# Altium PCB CH32V307VCT6-MINI底板文件.PcbDoc
Units mil, origin at the board's own origin, x right, y up, seen from the top; angles counter-clockwise.
Board outline 1950 x 1550 mil, 2 copper layers (Top Layer, Bottom Layer), stack 12.8 mil thick; 5 components, 0 nets, 98 pads, 0 vias.
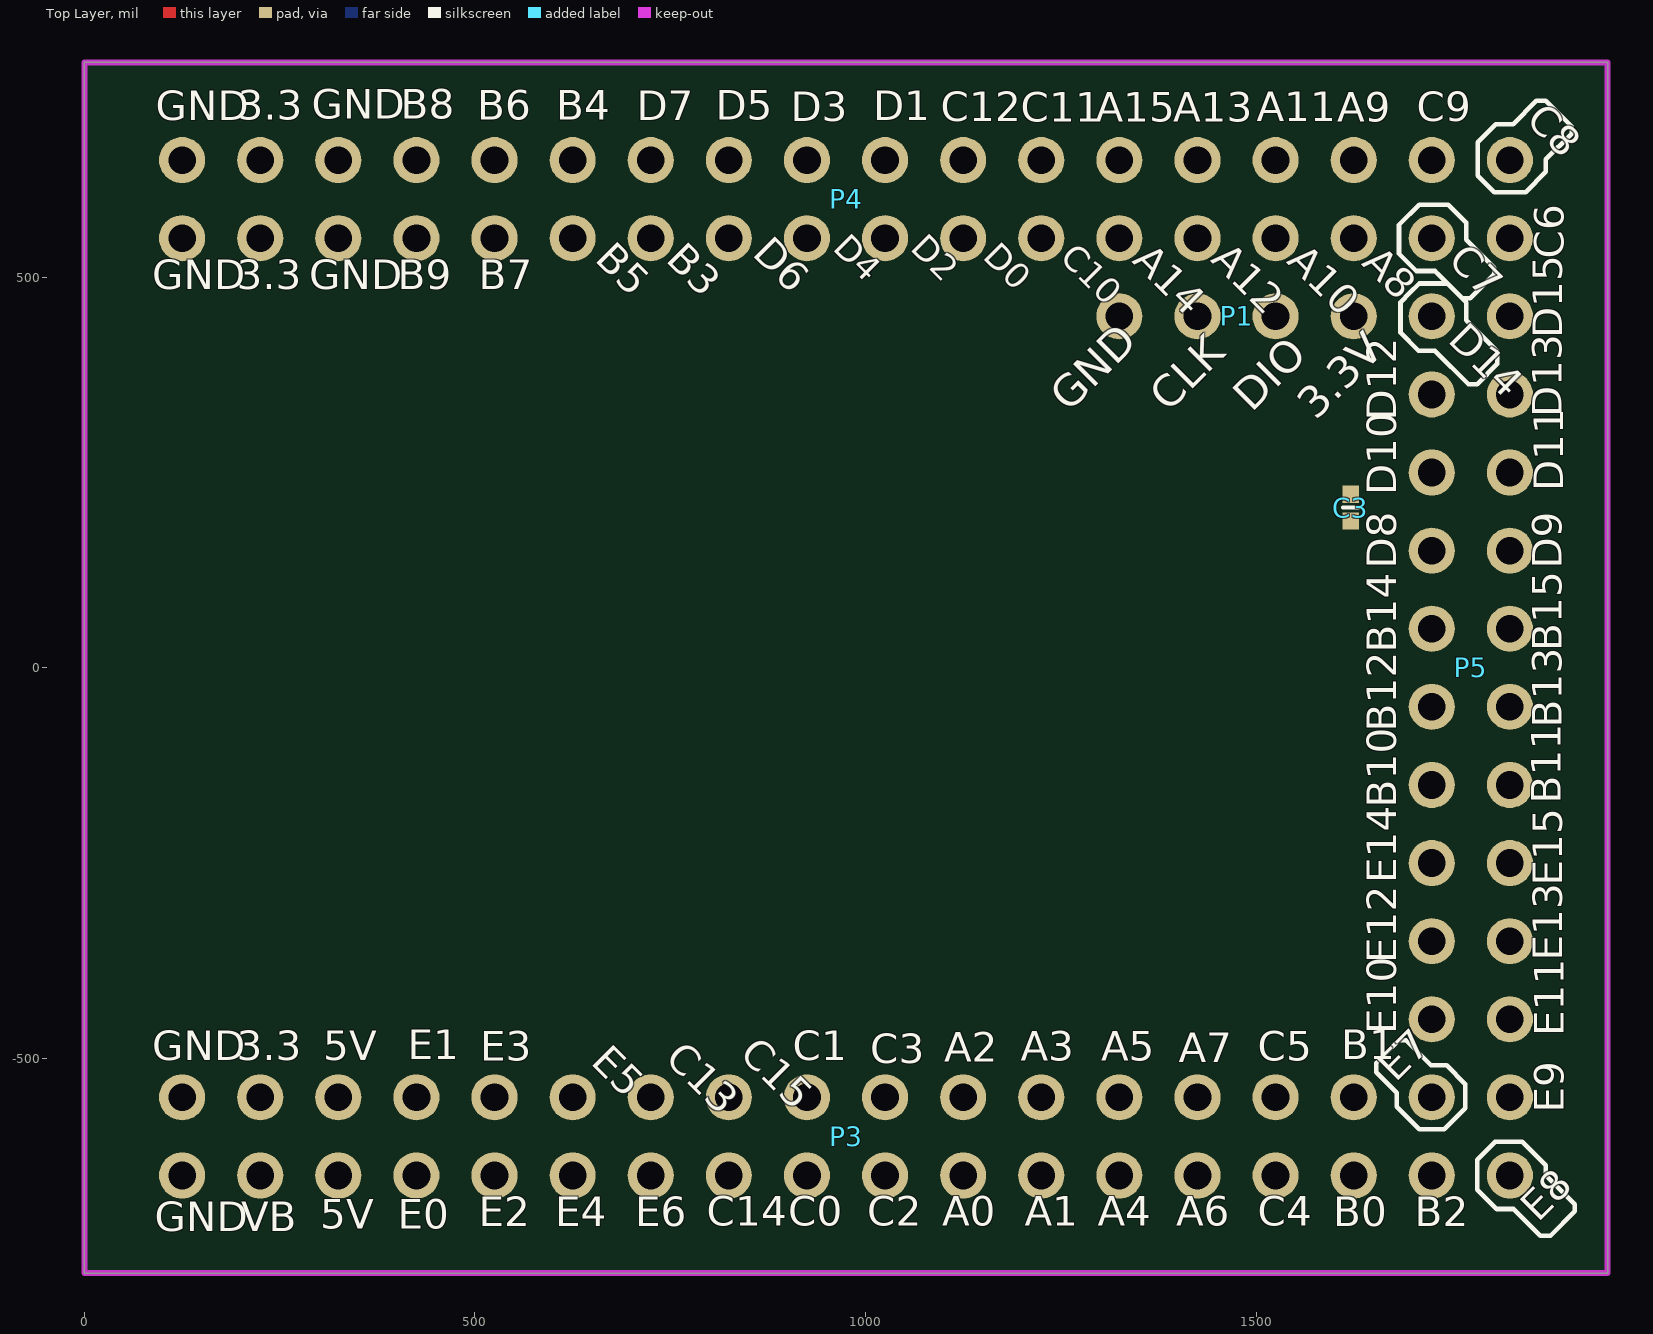
[diagram p0: Top Layer view]
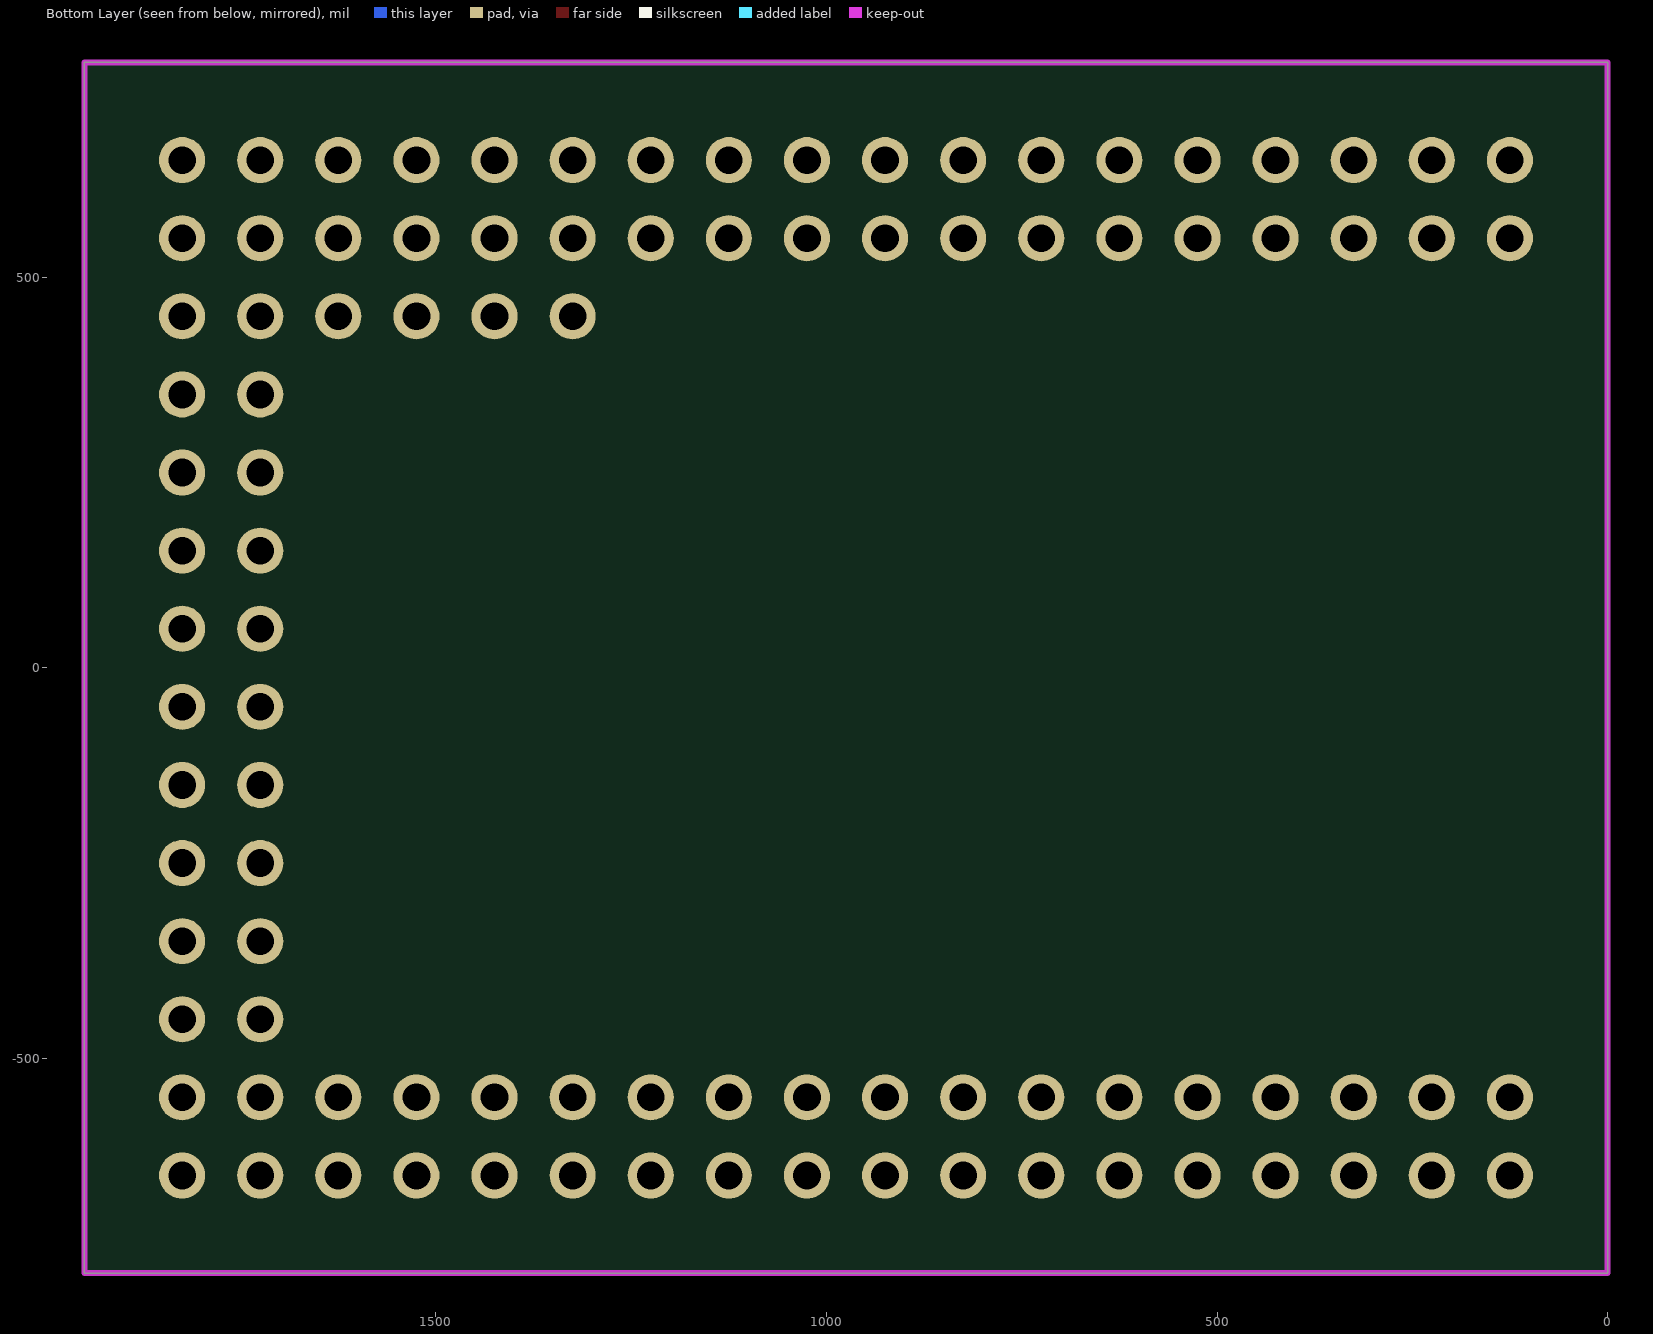
[diagram p1: Bottom Layer view, seen from below]

## Layer stack, top to bottom
Top Solder: solder mask 0.4, Solder Resist, Dk 3.5
Top Layer: signal copper 1.4
Dielectric 1: core 10, FR-4, Dk 4.2
Bottom Layer: signal copper 1.4
Bottom Solder: solder mask 0.4, Solder Resist, Dk 3.5

## Board outline
291,775 1950,775 1950,-464 1950,-775 45,-775 0,-775 0,-202 0,775 28,775

## Design rules (kind name [scope] priority, off if disabled: settings)
Clearance [All] p1: gap=5 ignorepadtopadclearanceinfootprint=FALSE except(0: Arc-Hole Track-Hole SMDPad-Hole THPad-Hole Via-Hole Fill-Hole Poly-Hole Region-Hole Text-Hole)
HoleToHoleClearance [All] p1: gap=0 allowstackedmicrovias=TRUE
Length "InNet('FMC_A3') Or InNet('FMC_A1')" [InNet('FMC_A3') Or InNet('FMC_A1')] p1: maxlimit=2088.86 minlimit=2000
MinimumSolderMaskSliver [All] p1: minsoldermaskwidth=0
PolygonConnect [(InPadClass('All Pads'))] p1: connectstyle=Relief reliefconductorwidth=20 reliefentries=4 polygonreliefangle="90 Angle" airgapwidth=10
PolygonConnect PolygonConnect_1 [All] p2: connectstyle=Direct reliefconductorwidth=10 reliefentries=4 polygonreliefangle="90 Angle" airgapwidth=10
RoutingVias [All] p1: holewidth=28 width=50 viastyle="Through Hole" minholewidth=28 minwidth=50 maxholewidth=28 maxwidth=50
SilkToSilkClearance [All] p1: silktosilkclearance=0
SilkToSolderMaskClearance [IsPad] p1: minsilkscreentomaskgap=0 clearancetoexposedcopper=TRUE
SolderMaskExpansion [All] p1: expansion=4 istentingtop=FALSE
Width [All] p1: maxlimit=50 minlimit=6 preferedwidth=7
26 further rules are at their usual default settings.

## Components (designator, comment, footprint, x,y, rotation, side; value= is the part's Value field where it differs from the comment)
C3 "100n" C0402 1621,205 r90 top value=104
P1 "4P,SWD" HDR1X4 1325,450 r0 top locked
P3 "Header 18X2" HDR2X18 125,-650 r0 top locked
P4 "Header 18X2" HDR2X18 1825,650 r180 top locked
P5 "Header 10X2" HDR2X10 1825,-450 r90 top locked

## Footprints (in the part's own frame and the unit in brackets; to place one, negate y for a bottom-side part, rotate by r counter-clockwise, add the part's x,y. Pads: shape width x height; smd on the part's side, far side on the other; paste and mask are expansions set on the pad)
C0402 [mm]
  rect 0.566x0.54 smd: 1(-0.433,0) 2(0.433,0)
  silkscreen extent 0,-0.25 0,0.25
HDR1X4 [mm] "Connector; Header; 4 Position"
  round 1.5 hole 0.9: 1(0,0) 2(2.54,0) 3(5.08,0) 4(7.62,0)
HDR2X10 [mm] "Connector; Header; 10x2 Position"
  round 1.5 hole 0.9: 1(0,0) 2(0,2.54) 3(2.54,0) 4(2.54,2.54) 5(5.08,0) 6(5.08,2.54) 7(7.62,0) 8(7.62,2.54) 9(10.16,0) 10(10.16,2.54) 11(12.7,0) 12(12.7,2.54) 13(15.24,0) 14(15.24,2.54) 15(17.78,0) 16(17.78,2.54) 17(20.32,0) 18(20.32,2.54) 19(22.86,0) 20(22.86,2.54)
HDR2X18 [mm] "Connector; Header; 18x2 Position"
  round 1.5 hole 0.9: 1(0,0) 2(0,2.54) 3(2.54,0) 4(2.54,2.54) 5(5.08,0) 6(5.08,2.54) 7(7.62,0) 8(7.62,2.54) 9(10.16,0) 10(10.16,2.54) 11(12.7,0) 12(12.7,2.54) 13(15.24,0) 14(15.24,2.54) 15(17.78,0) 16(17.78,2.54) 17(20.32,0) 18(20.32,2.54) 19(22.86,0) 20(22.86,2.54) 21(25.4,0) 22(25.4,2.54) 23(27.94,0) 24(27.94,2.54) 25(30.48,0) 26(30.48,2.54) 27(33.02,0) 28(33.02,2.54) 29(35.56,0) 30(35.56,2.54) 31(38.1,0) 32(38.1,2.54) 33(40.64,0) 34(40.64,2.54) 35(43.18,0) 36(43.18,2.54)

## Part data
C3: library part Cap, "Capacitor", LatestRevisionDate=17-Jul-2002, LatestRevisionNote="Re-released for DXP Platform.", Published=8-Jun-2000, Publisher="Altium Limited"
P1: library part "Header 4", "Header, 4-Pin", LatestRevisionDate=17-Jul-2002, LatestRevisionNote="Re-released for DXP Platform.", Publisher="Altium Limited"
P3 P4: "Header, 18-Pin, Dual row", LatestRevisionDate=17-Jul-2002, LatestRevisionNote="Re-released for DXP Platform.", Publisher="Altium Limited"
P5: "Header, 10-Pin, Dual row", LatestRevisionDate=17-Jul-2002, LatestRevisionNote="Re-released for DXP Platform.", Publisher="Altium Limited"

## Nets (pads, with @x,y where several pads share a name; then routed paths per layer and width w, separated by ;. In a path a pad name is that pad's centre, name@x,y a point inside that pad or via, vN(x,y) a via of type N, cw(c..) or ccw(c..) an arc to the next point about the centre after c; other vN are vias at no path point)
pads on no net: C3.1 C3.2 P1.1 P1.2 P1.3 P1.4 P3.1 P3.2 P3.3 P3.4 P3.5 P3.6 P3.7 P3.8 P3.9 P3.10 P3.11 P3.12 P3.13 P3.14 P3.15 P3.16 P3.17 P3.18 P3.19 P3.20 P3.21 P3.22 P3.23 P3.24 P3.25 P3.26 P3.27 P3.28 P3.29 P3.30 P3.31 P3.32 P3.33 P3.34 P3.35 P3.36 P4.1 P4.2 P4.3 P4.4 P4.5 P4.6 P4.7 P4.8 P4.9 P4.10 P4.11 P4.12 P4.13 P4.14 P4.15 P4.16 P4.17 P4.18 P4.19 P4.20 P4.21 P4.22 P4.23 P4.24 P4.25 P4.26 P4.27 P4.28 P4.29 P4.30 P4.31 P4.32 P4.33 P4.34 P4.35 P4.36 P5.1 P5.2 P5.3 P5.4 P5.5 P5.6 P5.7 P5.8 P5.9 P5.10 P5.11 P5.12 P5.13 P5.14 P5.15 P5.16 P5.17 P5.18 P5.19 P5.20

## Polygon pours and split planes (outlines as drawn)
no net on Top Layer "NONET_L01_P001" (solid, pour order 1): 1570,776
no net on Top Layer "NONET_L01_P000" (solid, pour order 0): 704,775

## Keep-outs
Keep-Out Layer:
  lines w8: 0,-775 1950,-775 1950,775 0,775 0,-775

## Silkscreen, mask and mechanical layers (free items; w line width, h text height)
Top Overlay:
  lines w6: 1654,-518 1654,-506 1667,-493 1683,-477 1692,-477 1724,-509 1744,-509 1768,-533 1768,-564 1741,-591 1709,-591 1680,-562 1680,-544 1654,-518 ; 1683,530 1683,567 1709,593 1746,593 1769,570 1769,548 1805,512 1805,504 1774,473 1764,473 1733,504 1729,508 1705,508 1683,530 ; 1685,429 1685,468 1697,480 1709,492 1745,492 1769,468 1769,445 1809,405 1809,389 1783,363 1772,363 1729,406 1708,406 1685,429 ; 1783,-668 1783,-630 1806,-607 1841,-607 1871,-637 1871,-650 1908,-687 1908,-696 1877,-727 1864,-727 1830,-693 1808,-693 1783,-668 ; 1784,630 1805,609 1845,609 1871,635 1871,651 1904,684 1904,693 1871,726 1859,726 1829,696 1807,696 1784,673 1784,630
  text "C8" at 1835,691 h65 r315
  text "GND" at 291,690 h65
  text "B8" at 405,690 h65
  text "3.3" at 196,689 h65
  text "B6" at 503,689 h65
  text "B4" at 604,689 h65
  text "D5" at 808,689 h65
  text "GND" at 91,688 h65
  text "D7" at 707,688 h65
  text "D1" at 1010,688 h65
  text "D3" at 904,687 h65
  text "C12" at 1096,687 h65
  text "A11" at 1501,687 h65
  text "C9" at 1706,687 h65
  text "C11" at 1199,686 h65
  text "A15" at 1295,686 h65
  text "A13" at 1394,686 h65
  text "A9" at 1604,686 h65
  text "D4" at 949,528 h55 r315
  text "D2" at 1048,528 h55 r315
  text "C6" at 1907,524 h65 r90
  text "D6" at 845,520 h65 r315
  text "D0" at 1141,517 h55 r315
  text "C10" at 1240,516 h55 r315
  text "B5" at 643,513 h65 r315
  text "B3" at 734,512 h65 r315
  text "A12" at 1432,512 h65 r315
  text "A14" at 1331,511 h65 r315
  text "C7" at 1735,511 h65 r315
  text "A10" at 1529,510 h65 r315
  text "A8" at 1625,508 h65 r315
  text "GND" at 87,472 h65
  text "3.3" at 195,472 h65
  text "GND" at 288,472 h65
  text "B9" at 401,472 h65
  text "B7" at 505,472 h65
  text "D15" at 1905,422 h65 r90
  text "D14" at 1735,409 h65 r315
  text "D13" at 1904,321 h65 r90
  text "GND" at 1270,316 h70 r45
  text "CLK" at 1397,316 h70 r45
  text "DIO" at 1504,316 h70 r45
  text "D12" at 1692,316 h65 r90
  text "3.3V" at 1586,306 h70 r45
  text "D11" at 1906,226 h65 r90
  text "D10" at 1692,221 h65 r90
  text "D8" at 1692,127 h65 r90
  text "D9" at 1904,127 h65 r90
  text "B15" at 1904,21 h65 r90
  text "B14" at 1692,19 h65 r90
  text "B13" at 1904,-77 h65 r90
  text "B12" at 1692,-82 h65 r90
  text "B11" at 1903,-174 h65 r90
  text "B10" at 1692,-179 h65 r90
  text "E14" at 1692,-276 h65 r90
  text "E15" at 1905,-279 h65 r90
  text "E13" at 1905,-375 h65 r90
  text "E12" at 1692,-378 h65 r90
  text "E10" at 1692,-469 h65 r90
  text "E11" at 1907,-472 h65 r90
  text "C15" at 828,-505 h65 r315
  text "C13" at 733,-511 h65 r315
  text "E1" at 414,-514 h65
  text "B1" at 1609,-514 h65
  text "GND" at 87,-515 h65
  text "3.3" at 195,-515 h65
  text "5V" at 306,-515 h65
  text "E5" at 638,-515 h65 r315
  text "C1" at 907,-515 h65
  text "E3" at 507,-516 h65
  text "A3" at 1199,-516 h65
  text "A5" at 1302,-516 h65
  text "C5" at 1502,-516 h65
  text "A2" at 1101,-517 h65
  text "A7" at 1401,-518 h65
  text "C3" at 1006,-519 h65
  text "E7" at 1688,-541 h65 r45
  text "E9" at 1907,-570 h65 r90
  text "E8" at 1870,-720 h65 r45
  text "C14" at 797,-727 h65
  text "C0" at 901,-727 h65
  text "C2" at 1002,-727 h65
  text "A0" at 1098,-727 h65
  text "A1" at 1204,-727 h65
  text "A4" at 1297,-727 h65
  text "A6" at 1398,-727 h65
  text "C4" at 1502,-727 h65
  text "E2" at 505,-728 h65
  text "E4" at 603,-728 h65
  text "E6" at 705,-728 h65
  text "B0" at 1599,-728 h65
  text "B2" at 1703,-728 h65
  text "5V" at 302,-731 h65
  text "E0" at 401,-731 h65
  text "GND" at 90,-734 h65
  text "VB" at 201,-734 h65

## Dimensions
125,650 to 1825,650 on Top Overlay
0,775 to 1950,775 on Top Overlay
125,-550 to 125,550 on Top Overlay
125,650 to 125,-650 on Top Overlay
0,775 to 0,-775 on Top Overlay